# Altium PCB DVT-Levelshifert-HT.PcbDoc
Units mm, origin at the board's own origin, x right, y up, seen from the top; angles counter-clockwise.
Board outline 40 x 40 mm, 2 copper layers (Top Layer, Bottom Layer); 13 components, 10 nets, 47 pads, 0 vias.
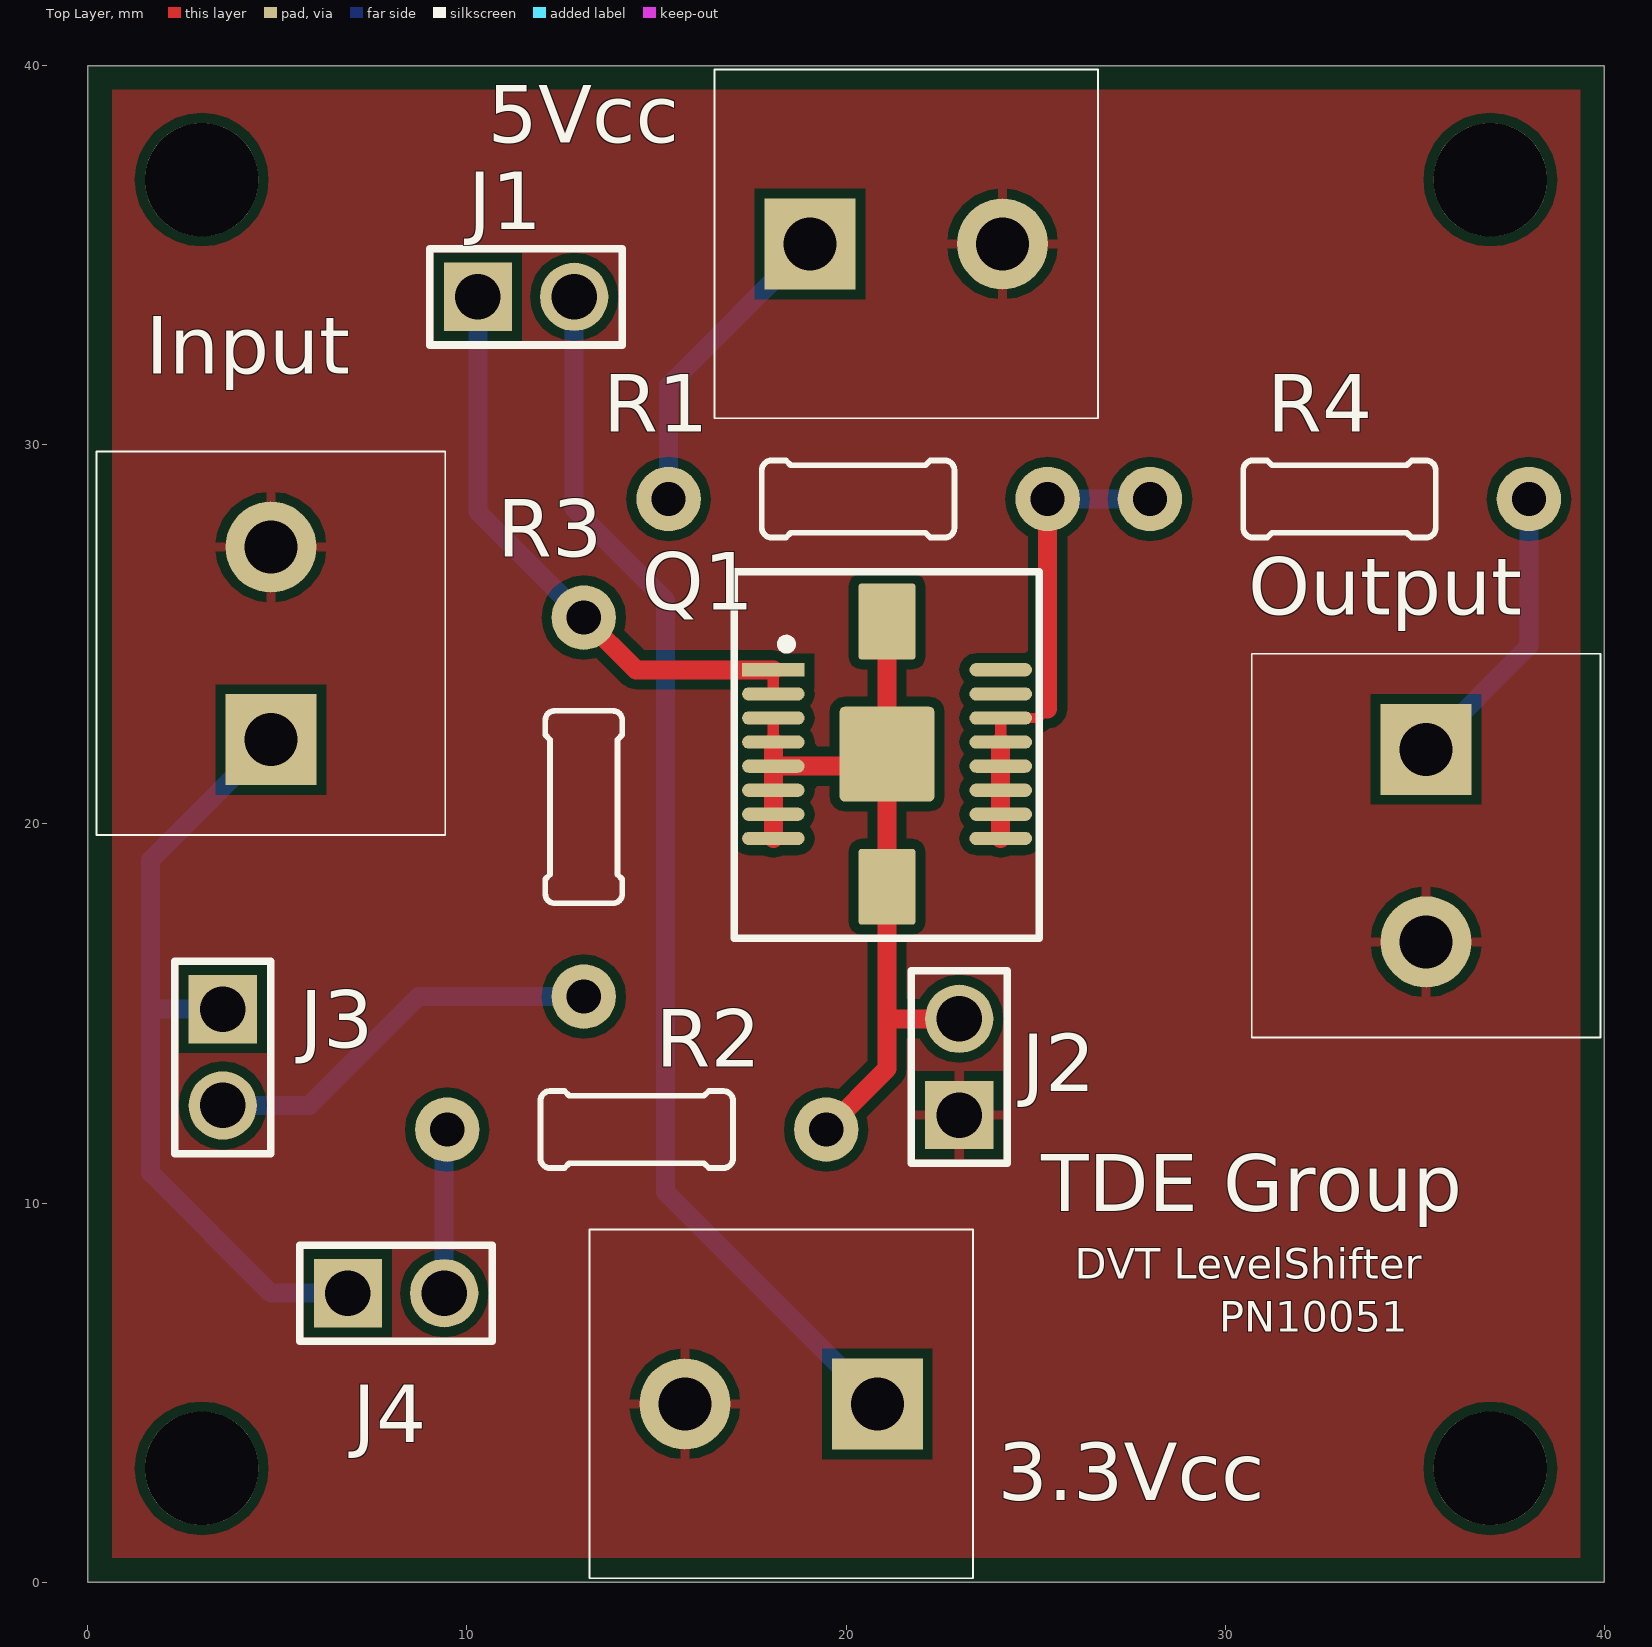
[diagram p0: Top Layer view]
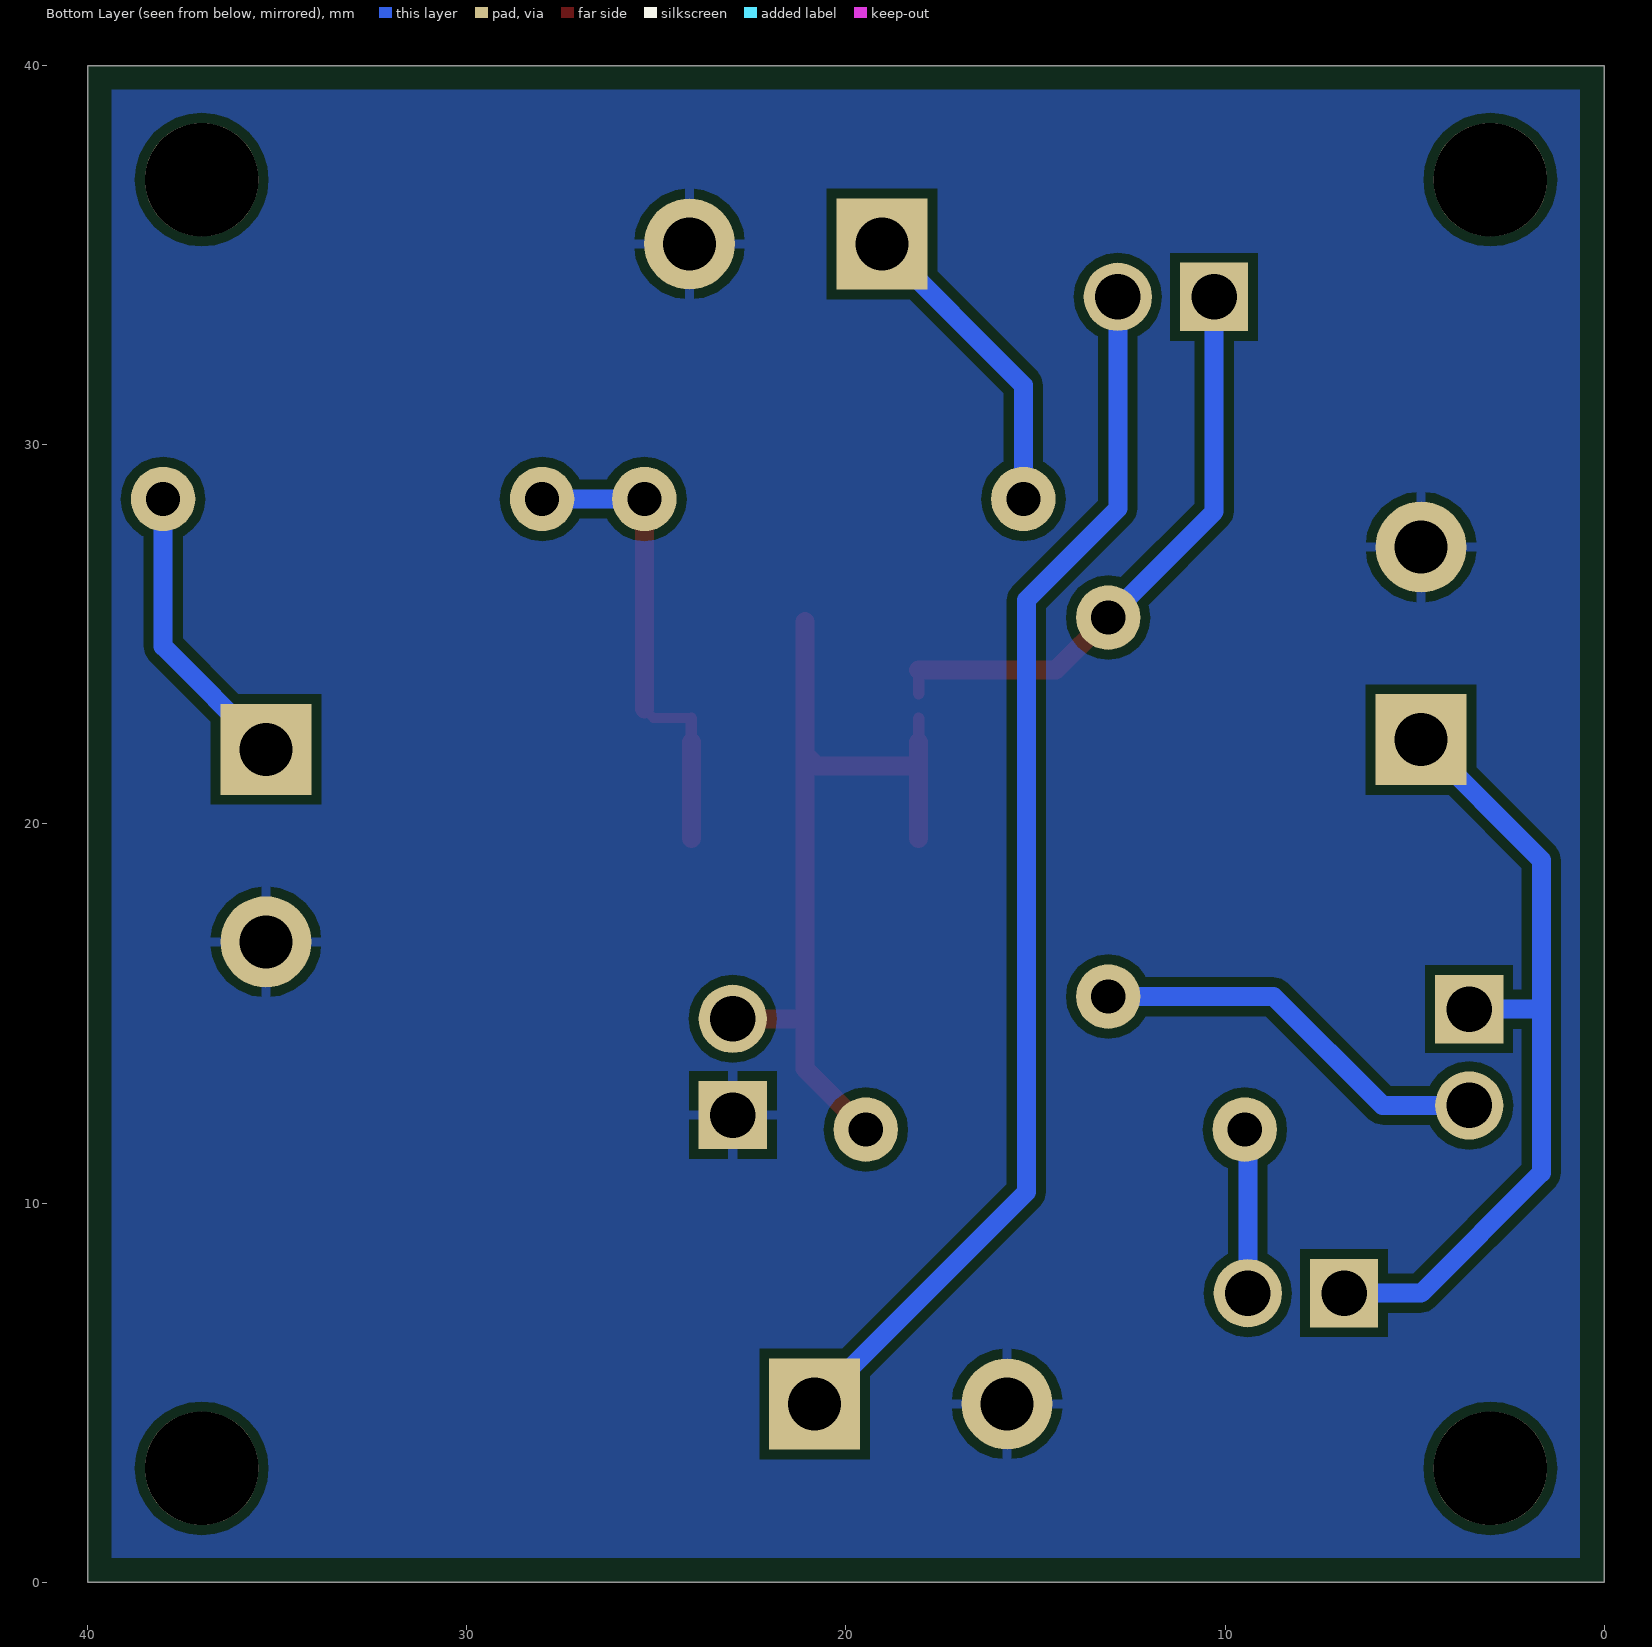
[diagram p1: Bottom Layer view, seen from below]
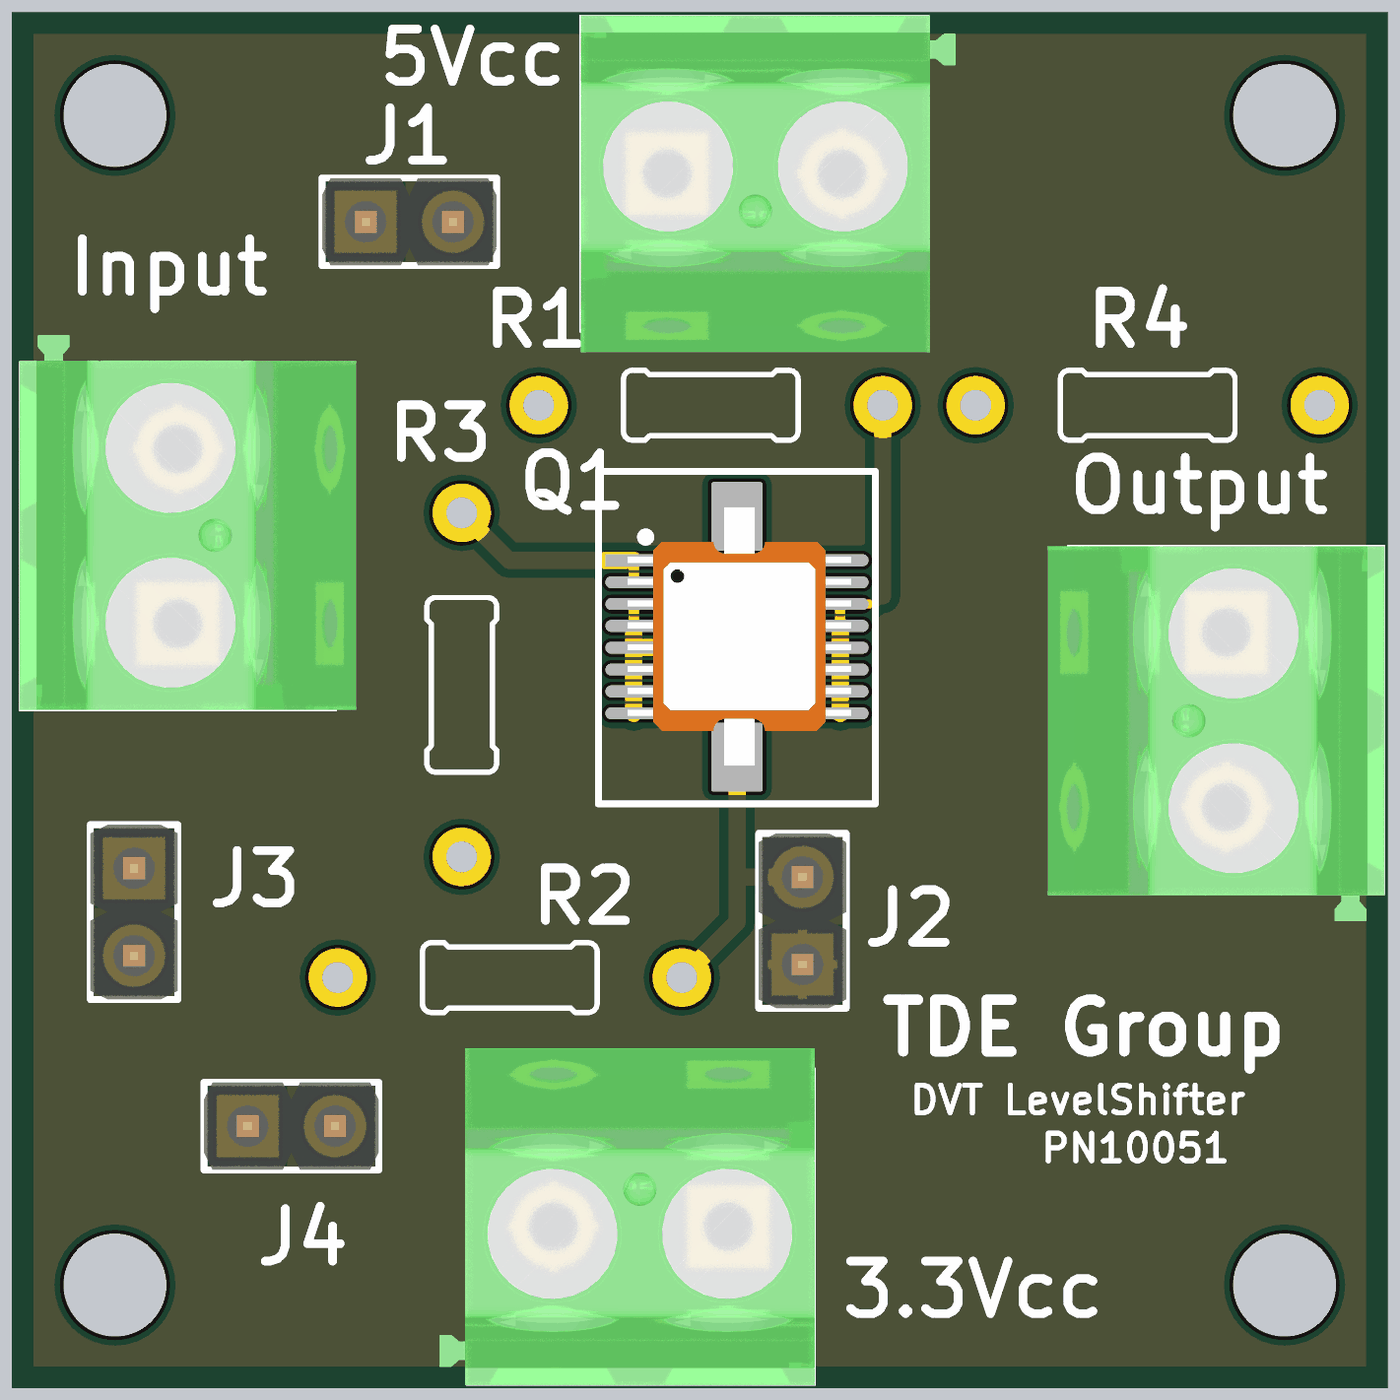
[diagram p2: 3D render of the assembled board from above, using the file's embedded part models]

## Layer stack, top to bottom
Top Solder: solder mask 0.0102, Solder Resist, Dk 3.5
Top Layer: signal copper 0.0356
Dielectric 1: dielectric 0.32, FR-4, Dk 4.8
Bottom Layer: signal copper 0.0356
Bottom Solder: solder mask 0.0102, Solder Resist, Dk 3.5

## Board outline
0,0 0,40 40,40 40,0

## Design rules (kind name [scope] priority, off if disabled: settings)
Clearance Polygons [InPolygon] p1: gap=0.254
Clearance [All] p2: gap=0.15
MinimumSolderMaskSliver [All] p1: minsoldermaskwidth=0.1
PolygonConnect [All] p1: connectstyle=Relief reliefconductorwidth=0.254 reliefentries=4 polygonreliefangle="90 Angle" airgapwidth=0.254
RoomDefinition DVT-Levelshifert-HT [InComponentClass('DVT-Levelshifert-HT')] p1: confinementstyle=ConfineIn formatcopy=TRUE lockcomponents=FALSE outline -10.795,-4.699 49.911,-4.699 49.911,44.196 -10.795,44.196
RoutingVias [All] p1: holewidth=0.711 width=1.27 viastyle="Through Hole" minholewidth=0 minwidth=0 maxholewidth=0.711 maxwidth=1.27
SilkToSilkClearance [All] p1: silktosilkclearance=0
SilkToSolderMaskClearance [IsPad] p1: minsilkscreentomaskgap=0.1 clearancetoexposedcopper=TRUE
SolderMaskExpansion [All] p1: expansion=0.102
Width [All] p1: maxlimit=4 minlimit=0.254 preferedwidth=0.5
27 further rules are at their usual default settings.

## Components (designator, comment, footprint, x,y, rotation, side; value= is the part's Value field where it differs from the comment)
3.3Vcc "PHOENIX_1715721" Phoenix-2-5_08 18.288,4.699 r180 top
5Vcc "PHOENIX_1715721" Phoenix-2-5_08 21.59,35.306 r0 top
Input "PHOENIX_1715721" Phoenix-2-5_08 4.826,24.765 r90 top
J1 "PHOENIX_1715721" HDR1X2 11.557,33.909 r0 top
J2 "PHOENIX_1715721" HDR1X2 22.987,13.589 r90 top
J3 "PHOENIX_1715721" HDR1X2 3.556,13.843 r270 top
J4 "PHOENIX_1715721" HDR1X2 8.128,7.62 r0 top
Output "PHOENIX_1715721" Phoenix-2-5_08 35.306,19.431 r270 top
Q1 "CHT-NMOS8001" "TDFP16 - NMOS8001" 21.082,21.844 r0 top
R1 "Resistor-Dummy-THT" Dummy-10mm 20.32,28.575 r180 top
R2 "Resistor-Dummy-THT" Dummy-10mm 14.478,11.938 r0 top
R3 "Resistor-Dummy-THT" Dummy-10mm 13.081,20.447 r270 top
R4 "Resistor-Dummy-THT" Dummy-10mm 33.02,28.575 r180 top

## Footprints (in the part's own frame and the unit in brackets; to place one, negate y for a bottom-side part, rotate by r counter-clockwise, add the part's x,y. Pads: shape width x height; smd on the part's side, far side on the other; paste and mask are expansions set on the pad)
Dummy-10mm [mm] "Dummy-10mm"
  round 1.7 hole 0.9: 1(-5,0) 2(5,0)
  silkscreen extent -2.54,-1.02 2.54,1.02, body extent -2.39,-0.88 2.41,0.88, height 1.87
HDR1X2 [mm] "Connector; Header; 2 Position"
  rect 1.8x1.8 hole 1.2: 1(-1.27,0)
  round 1.8 hole 1.2: 2(1.27,0)
  silkscreen extent -2.54,-1.27 2.54,1.27, body extent -2.54,-1.27 2.54,1.27, height 8.62
Phoenix-2-5_08 [mm] "Phoenix, 1715721"
  rect 2.4x2.4 hole 1.4: 1(-2.54,0)
  round 2.4 hole 1.4: 2(2.54,0)
  silkscreen extent -5.06,-4.6 5.06,4.6, body extent -5.05,-5.19 5.85,4.61, height 14.2
"TDFP16 - NMOS8001" [mm] "TDFP16"
  oval 1.65x0.35 smd: 1(-3,1.587) 2(-3,-2.225) 2(-3,-1.587) 2(-3,-0.953) 2(-3,-0.318) 2(-3,0.318) 2(-3,0.953) 3(3,-2.225) 3(3,-1.587) 3(3,-0.953) 3(3,-0.318) 3(3,0.318) 3(3,0.953) 4(3,1.587) 5(3,2.225)
  rect 1.65x0.35 smd: 1(-3,2.225)
  rrect10% 1.5x2 smd: 2(0,-3.5) 2(0,3.5)
  rrect10% 2.5x2.5 smd: 2(0,0)
  silkscreen extent -4.03,-4.85 4.02,4.81, body extent -3.18,-3.74 3.32,3.76, height 1.15

## Part data
3.3Vcc 5Vcc Input Output: library part 2Pol_1715721, "Phoenix, 2 pol, 5.08mm, 22A, 715721"
J1 J2 J3 J4: library part Plug_2_90_2.54, "Plug, 2-Pin"
Q1: "Comparator, Hi-Temp, 25MHz"

## Free pads (board coordinates)
  round 3 hole 3 unplated: 0(3,3) 1(37,37) 2(37,3) 3(3,37)

## Nets (pads, with @x,y where several pads share a name; then routed paths per layer and width w, separated by ;. In a path a pad name is that pad's centre, name@x,y a point inside that pad or via, vN(x,y) a via of type N, cw(c..) or ccw(c..) an arc to the next point about the centre after c; other vN are vias at no path point)
3.3V: 3.3Vcc.1 J1.2 | length 32.5
  Bottom Layer w0.5: J1.2 12.827,28.321 15.24,25.908 15.24,10.287 3.3Vcc.1
5V: 5Vcc.1 R1.2 | length 8.3
  Bottom Layer w0.5: R1.2 15.32,31.576 5Vcc.1
GND: 3.3Vcc.2 5Vcc.2 Input.2 J2.1 Output.2
NetInput_1: Input.1 J3.1 J4.1 | length 21.2
  Bottom Layer w0.5: J3.1 1.651,15.113 ; Input.1 1.651,19.05 1.651,15.113 ; J4.1 4.826,7.62 1.651,10.795 1.651,15.113
NetJ1_1: J1.1 Q1.1 R3.1 | length 15.8
  Top Layer w0.3: Q1.1@18.082,23.431 Q1.1@18.082,24.069
  Top Layer w0.5: R3.1 14.459,24.069 Q1.1@18.082,24.069
  Bottom Layer w0.5: J1.1 10.287,28.241 R3.1
NetJ2_2: J2.2 Q1.2 R2.2 | length 22.3
  Top Layer w0.3: Q1.2@18.082,22.162 Q1.2@18.082,22.796
  Top Layer w0.5: Q1.2@18.082,19.619 18.082,20.256 18.082,20.892 Q1.2@18.082,21.526 ; Q1.2@18.082,22.162 Q1.2@18.082,21.526 ; R2.2 21.082,13.542 21.082,18.344 Q1.2@21.082,21.844 ; 21.082,14.859 J2.2 ; Q1.2@21.082,25.344 Q1.2@21.082,21.844 ; Q1.2@18.082,21.526 20.764,21.526 Q1.2@21.082,21.844
NetJ3_2: J3.2 R3.2 | length 10.7
  Bottom Layer w0.5: J3.2 5.842,12.573 8.716,15.447 R3.2
NetJ4_2: J4.2 R2.1 | length 4.4
  Bottom Layer w0.5: J4.2 9.398,11.858 R2.1
NetOutput_1: Output.1 R4.1 | length 7.7
  Bottom Layer w0.5: Output.1 38.02,24.685 R4.1
NetQ1_3: Q1.3 R1.1 R4.2 | length 12.8
  Top Layer w0.254: Q1.3@24.082,22.796 25.082,22.796 25.32,23.034
  Top Layer w0.3: Q1.3@24.082,22.162 Q1.3@24.082,22.796
  Top Layer w0.5: Q1.3@24.082,19.619 24.082,20.256 24.082,20.892 24.082,21.526 Q1.3@24.082,22.162 ; 25.32,23.034 R1.1
  Bottom Layer w0.5: R1.1 R4.2
pads on no net: Q1.4 Q1.5

## Polygon pours and split planes (outlines as drawn)
GND on Bottom Layer "GND-Bottom" (solid, pour order 0): 0.635,0.635 39.37,0.635 39.37,39.37 0.635,39.37
GND on Top Layer "GND-Top" (solid, pour order 2): 0.635,0.635 39.37,0.635 39.37,39.37 0.635,39.37

## Silkscreen, mask and mechanical layers (free items; w line width, h text height)
Top Overlay:
  text "TDE Group" at 25.146,9.779 h1.5
  text "DVT LevelShifter" at 26.035,8.001 h0.8
  text "PN10051" at 29.845,6.604 h0.8
outline:
  the board outline again, w0.1

## Dimensions
40,0 to 40,40 on Mechanical 16
40,40 to 0,40 on Mechanical 16